# Altium PCB Order2.PcbDoc
Units mm, origin at the board's own origin, x right, y up, seen from the top; angles counter-clockwise.
Board outline 40.89 x 48.64 mm, 2 copper layers (Top Layer, Bottom Layer); 81 components, 0 nets, 359 pads, 52 vias.
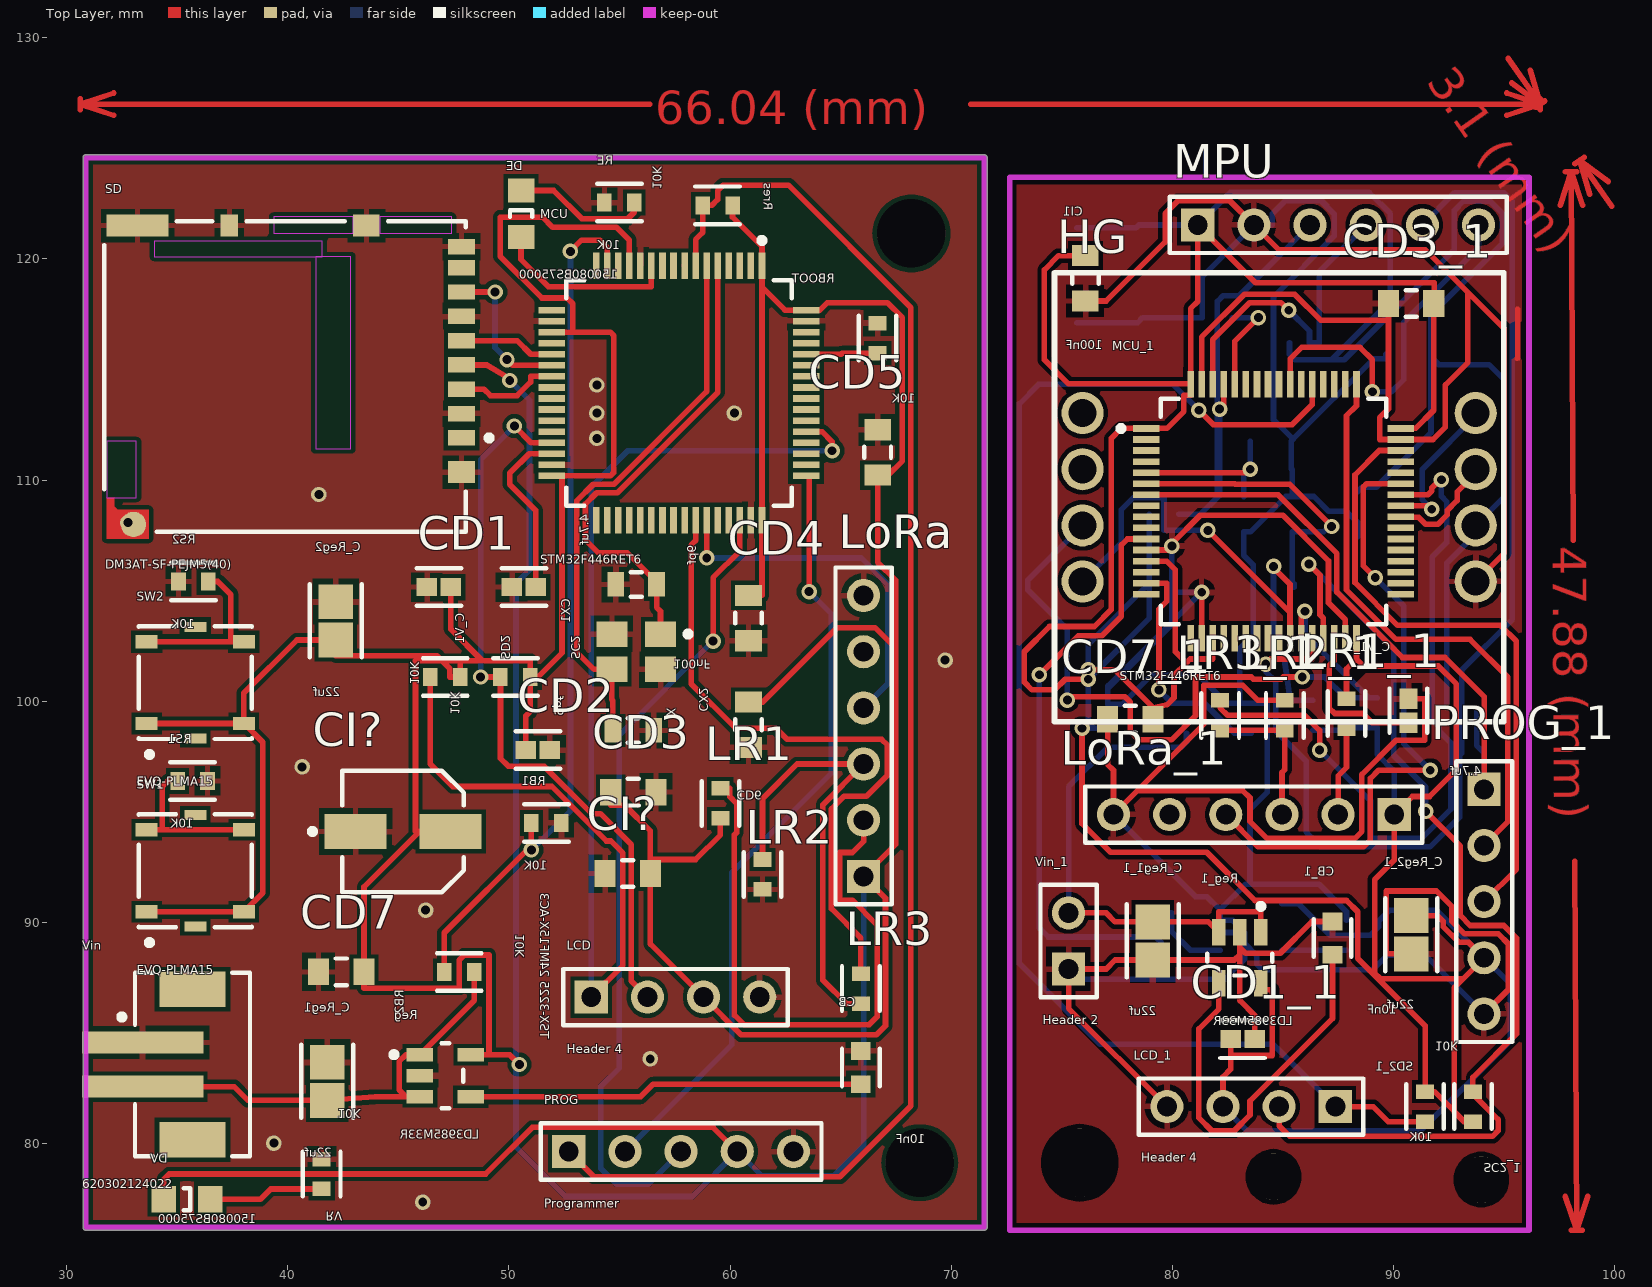
[diagram p0: Top Layer view]
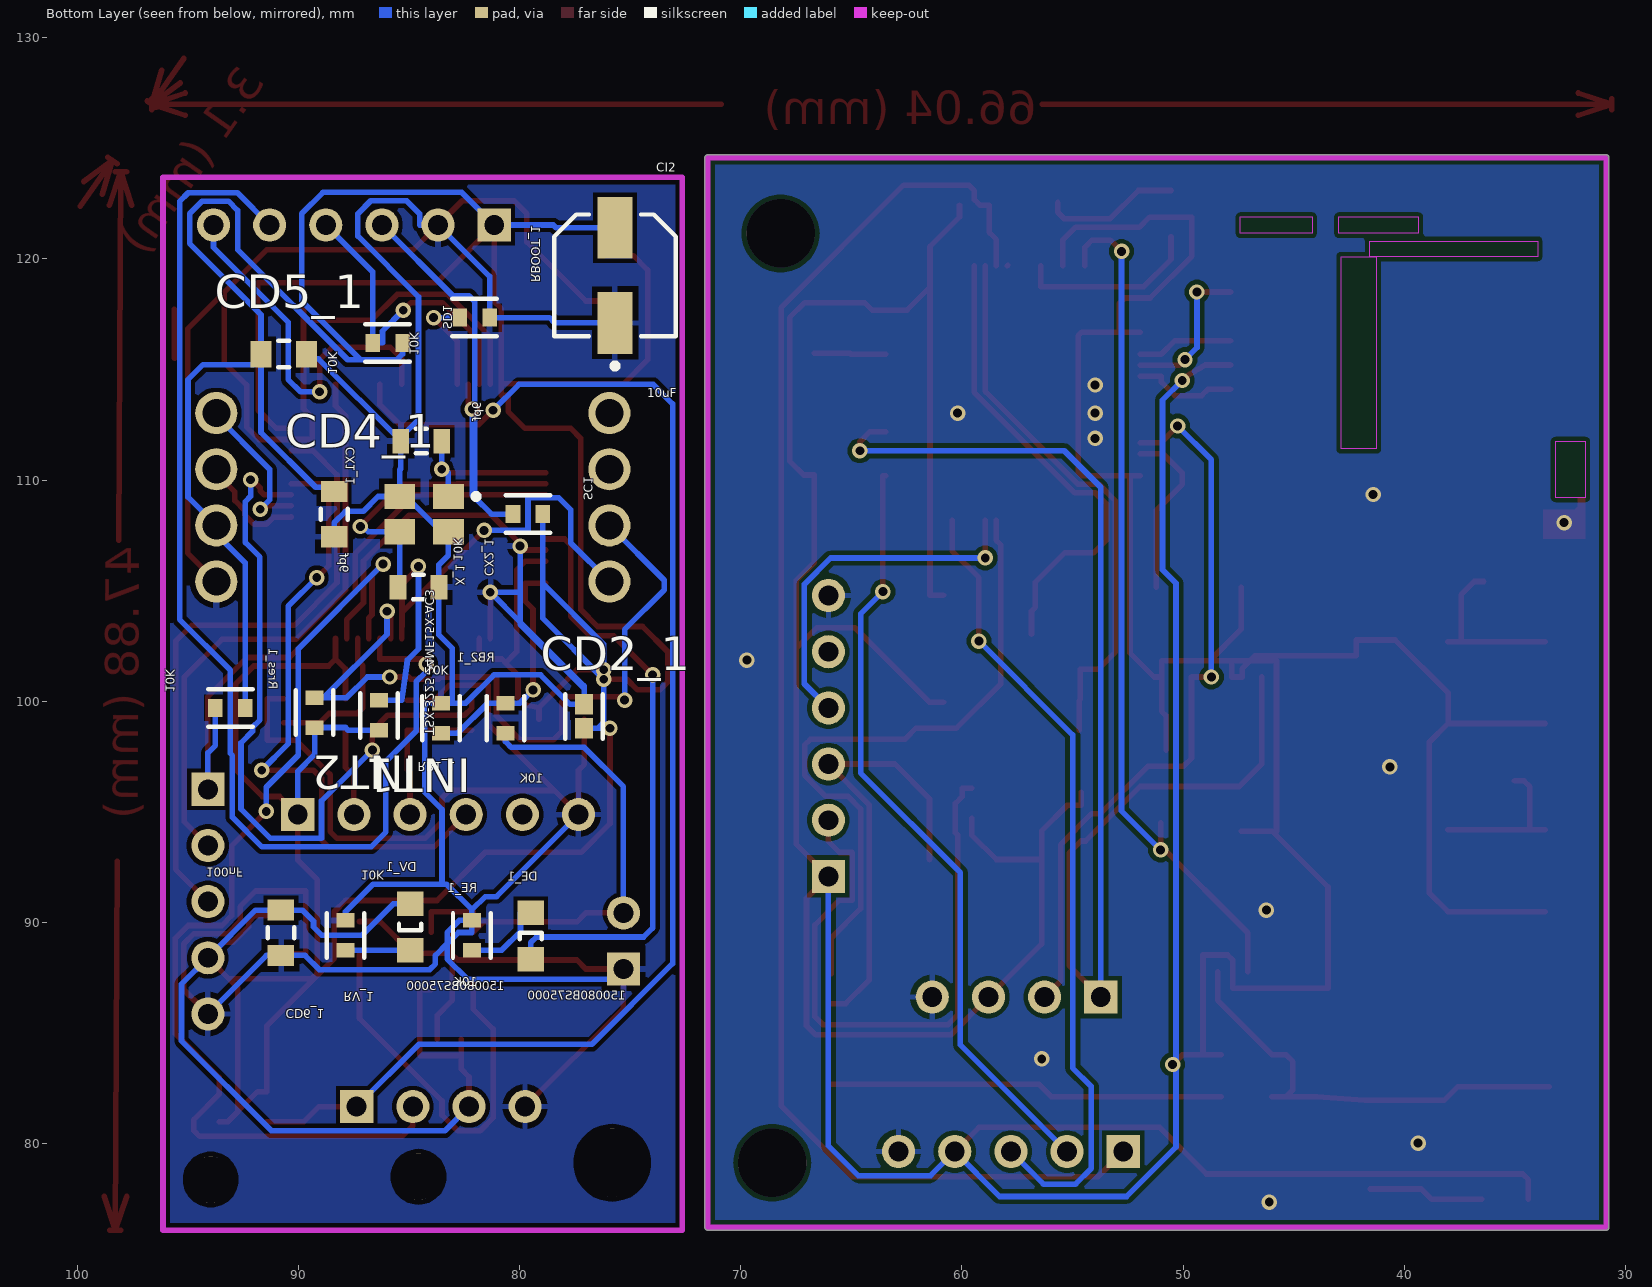
[diagram p1: Bottom Layer view, seen from below]

## Layer stack, top to bottom
Top Solder: solder mask 0.0102, Solder Resist, Dk 3.5
Top Layer: signal copper 0.0356
Dielectric 1: dielectric 0.32, FR-4, Dk 4.8
Bottom Layer: signal copper 0.0356
Bottom Solder: solder mask 0.0102, Solder Resist, Dk 3.5

## Board outline
30.861,76.073 cw(c30.861,76.2) 30.734,76.2 30.734,124.587 cw(c30.861,124.587) 30.861,124.714 71.501,124.714 cw(c71.501,124.587) 71.628,124.587 71.628,76.2 cw(c71.501,76.2) 71.501,76.073

## Design rules (kind name [scope] priority, off if disabled: settings)
Clearance [All] p1: gap=0.254 ignorepadtopadclearanceinfootprint=FALSE except(0: Arc-Hole Track-Hole SMDPad-Hole THPad-Hole Via-Hole Fill-Hole Poly-Hole Region-Hole Text-Hole)
PolygonConnect [All] p1: connectstyle=Relief reliefconductorwidth=0.254 reliefentries=4 polygonreliefangle="90 Angle" airgapwidth=0.254
RoutingVias [All] p1: holewidth=0.711 width=1.27 viastyle="Through Hole" minholewidth=0.711 minwidth=1.27 maxholewidth=0.711 maxwidth=1.27
SolderMaskExpansion [All] p1: expansion=0.102 istentingtop=FALSE
Width [All] p1: maxlimit=0.254 minlimit=0.254 preferedwidth=0.254
30 further rules are at their usual default settings.

## Components (designator, comment, footprint, x,y, rotation, side; value= is the part's Value field where it differs from the comment)
C_Reg1 "22uf" FP-C2012-125-0_2-IPC_A 41.783,82.804 r270 top
C_Reg1_1 "22uf" FP-C2012-125-0_2-IPC_A 79.121,89.154 r90 top (schematic designator C_Reg1)
C_Reg2 "22uf" FP-C2012-125-0_2-IPC_A 42.164,103.632 r270 top
C_Reg2_1 "22uf" FP-C2012-125-0_2-IPC_A 90.805,89.433 r90 top (schematic designator C_Reg2)
C_V1 "4.7uf" FP-C1608-080-0_1-IPC_C 50.673,105.156 r180 top
C_V1_1 "4.7uf" FP-C1608-080-0_1-IPC_C 90.678,99.568 r90 top (schematic designator C_V1)
CB "10nF" FP-CC0603-DA-MFG 65.913,83.427 r90 top value="10 nF"
CB_1 "10nF" FP-CC0603-DA-MFG 87.249,89.281 r90 top value="10 nF" (schematic designator CB)
CD1 "4.7uf" FP-C1608-080-0_1-IPC_C 46.83,105.156 r180 top
CD1_1 "4.7uf" FP-C1608-080-0_1-IPC_C 83.185,84.709 r0 top (schematic designator CD1)
CD2 "4.7uf" FP-C1608-080-0_1-IPC_C 51.308,97.79 r0 top
CD2_1 "4.7uf" FP-C1608-080-0_1-IPC_C 77.089,99.314 r90 bottom (schematic designator CD2)
CD3 "100nF" FP-CGA3E-0_3-0_1-IPC_A 55.626,95.885 r0 top
CD3_1 "100nF" FP-CGA3E-0_3-0_1-IPC_A 90.805,117.983 r180 top (schematic designator CD3)
CD4 "100nF" FP-CGA3E-0_3-0_1-IPC_A 60.833,103.759 r270 top
CD4_1 "100nF" FP-CGA3E-0_3-0_1-IPC_A 88.392,108.458 r270 bottom (schematic designator CD4)
CD5 "100nF" FP-CGA3E-0_3-0_1-IPC_A 66.675,111.252 r90 top
CD5_1 "100nF" FP-CGA3E-0_3-0_1-IPC_A 90.678,115.697 r180 bottom (schematic designator CD5)
CD6 "100nF" FP-CGA3E-0_3-0_1-IPC_A 60.833,98.933 r270 top
CD6_1 "100nF" FP-CGA3E-0_3-0_1-IPC_A 90.805,89.526 r270 bottom (schematic designator CD6)
CD7 "100nF" FP-CGA3E-0_3-0_1-IPC_A 42.418,87.757 r180 top
CD7_1 "100nF" FP-CGA3E-0_3-0_1-IPC_A 78.105,99.187 r180 top (schematic designator CD7)
CI1 "100nF" FP-CGA3E-0_3-0_1-IPC_A 76.073,119.126 r90 top
CI2 "10uF" FP-SC-MFG 75.692,119.262 r90 bottom
CI? "100nF" FP-CGA3E-0_3-0_1-IPC_A 55.372,92.202 r0 top
CI? "10uF" FP-SC-MFG 45.212,94.107 r0 top
CX1 "9pf" FP-CGA3E-0_3-0_1-IPC_B 55.753,105.283 r180 top
CX1_1 "9pf" FP-CGA3E-0_3-0_1-IPC_B 84.455,111.76 r0 bottom (schematic designator CX1)
CX2 "9pf" FP-CGA3E-0_3-0_1-IPC_B 55.626,98.679 r0 top
CX2_1 "9pf" FP-CGA3E-0_3-0_1-IPC_B 84.582,105.156 r180 bottom (schematic designator CX2)
DE "150080BS75000" 0805_A 50.546,122.047 r270 top
DE_1 "150080BS75000" 0805_A 79.502,89.374 r270 bottom (schematic designator DE)
DV "150080BS75000" 0805_A 35.433,77.47 r180 top
DV_1 "150080BS75000" 0805_A 84.963,89.789 r90 bottom (schematic designator DV)
HG "Header 4X2" PCBComponent_1 84.836,109.22 r90 top
INT1 "10K" FP-RC0603-0_55-IPC_C 86.36,99.356 r270 bottom
INT2 "10K" FP-RC0603-0_55-IPC_C 89.281,99.483 r270 bottom
LCD "Header 4" HDR1X4 53.721,86.614 r0 top
LCD_1 "Header 4" HDR1X4 87.376,81.661 r180 top (schematic designator LCD)
LoRa "Header 6" HDR1X6 66.04,92.075 r90 top
LoRa_1 "Header 6" HDR1X6 90.043,94.869 r180 top (schematic designator LoRa)
LR1 "10K" FP-RC0603-0_55-IPC_C 59.563,95.377 r90 top
LR1_1 "10K" FP-RC0603-0_55-IPC_C 87.884,99.441 r270 top (schematic designator LR1)
LR2 "10K" FP-RC0603-0_55-IPC_C 61.468,92.16 r90 top
LR2_1 "10K" FP-RC0603-0_55-IPC_C 85.09,99.356 r270 top (schematic designator LR2)
LR3 "4.7K" FP-RC0603-0_55-IPC_C 65.913,86.995 r270 top
LR3_1 "4.7K" FP-RC0603-0_55-IPC_C 82.169,99.356 r270 top (schematic designator LR3)
MCU "STM32F446RET6" FP-LQFP64-5W-MFG 57.693,113.939 r270 top
MCU_1 "STM32F446RET6" FP-LQFP64-5W-MFG 84.582,108.585 r0 top (schematic designator MCU)
MPU "Header 6" HDR1X6 81.153,121.539 r0 top
PROG "Programmer" HDR1X5 52.705,79.629 r0 top
PROG_1 "Programmer" HDR1X5 94.107,96.012 r270 top (schematic designator PROG)
RB1 "10K" FP-RC0603-0_55-IPC_C 51.689,94.488 r0 top
RB1_1 "10K" FP-RC0603-0_55-IPC_C 83.566,99.229 r90 bottom (schematic designator RB1)
RB2 "10K" FP-RC0603-0_55-IPC_C 47.752,87.757 r180 top
RB2_1 "10K" FP-RC0603-0_55-IPC_C 80.645,99.229 r90 bottom (schematic designator RB2)
RBOOT "10K" FP-RC0603-0_55-IPC_C 66.675,116.417 r90 top
RBOOT_1 "10K" FP-RC0603-0_55-IPC_C 82.042,117.348 r180 bottom (schematic designator RBOOT)
RE "10K" FP-RC0603-0_55-IPC_C 54.991,122.555 r180 top
RE_1 "10K" FP-RC0603-0_55-IPC_C 82.169,89.408 r90 bottom (schematic designator RE)
Reg "LD3985M33R" FP-SOT23-5L-7049676-MFG 47.124,83.058 r0 top
Reg_1 "LD3985M33R" FP-SOT23-5L-7049676-MFG 83.058,88.392 r270 top (schematic designator Reg)
Rres "10K" FP-RC0603-0_55-IPC_C 59.436,122.428 r0 top
Rres_1 "10K" FP-RC0603-0_55-IPC_C 93.091,99.695 r180 bottom (schematic designator Rres)
RS1 "10K" FP-RC0603-0_55-IPC_C 35.687,96.393 r0 top
RS2 "10K" FP-RC0603-0_55-IPC_C 35.729,105.41 r180 top
RV "10K" FP-RC0603-0_55-IPC_C 41.529,78.613 r90 top
RV_1 "10K" FP-RC0603-0_55-IPC_C 87.884,89.408 r90 bottom (schematic designator RV)
SC1 "10K" FP-RC0603-0_55-IPC_C 79.629,108.458 r180 bottom
SC2 "10K" FP-RC0603-0_55-IPC_C 50.292,101.092 r0 top
SC2_1 "10K" FP-RC0603-0_55-IPC_C 93.599,81.661 r270 top (schematic designator SC2)
SD "DM3AT-SF-PEJM5(40)" FP-DM3AT-SF-PEJM5_40-MFG 39.878,114.681 r270 top
SD1 "10K" FP-RC0603-0_55-IPC_C 85.979,116.205 r180 bottom
SD2 "10K" FP-RC0603-0_55-IPC_C 47.117,101.092 r0 top
SD2_1 "10K" FP-RC0603-0_55-IPC_C 91.44,81.661 r90 top (schematic designator SD2)
SW1 "EVQ-PLMA15" FP-EVQ-PLMA15-MFG 35.814,92.329 r90 top
SW2 "EVQ-PLMA15" FP-EVQ-PLMA15-MFG 35.814,100.838 r90 top
Vin "620302124022" 620302124022 35.687,83.566 r90 top
Vin_1 "Header 2" HDR1X2 75.311,87.884 r90 top (schematic designator Vin)
X "TSX-3225 24MF15X-AC3" EPSON-TSX-3225_V 55.753,102.235 r180 top
X_1 "TSX-3225 24MF15X-AC3" EPSON-TSX-3225_V 84.328,108.458 r0 bottom (schematic designator X)

## Footprints (in the part's own frame and the unit in brackets; to place one, negate y for a bottom-side part, rotate by r counter-clockwise, add the part's x,y. Pads: shape width x height; smd on the part's side, far side on the other; paste and mask are expansions set on the pad)
0805_A [mm] "Chip LED, 2-Leads, Body 2.0x1.3mm, IPC Medium Density"
  rect 1.1x1.2 smd: 1(-1.05,0) 2(1.05,0)
  silkscreen extent -0.15,-0.5 0.15,0.5, body extent -1,-0.63 1,0.63, height 0.68
620302124022 [mm] "2.00mm SMT Male Vertical Shrouded Header, 2p"
  rect 1x5.5 smd: 1(1,2.25) 2(-1,2.25)
  rect 1.6x3 smd: MP1(-3.4,0) MP2(3.4,0)
  silkscreen extent -4.15,-2.6 4.15,3.32, body extent -4,-2.5 4,4.51, height 6.77
EPSON-TSX-3225_V [mm] "SMD, 4-Leads, Body 3.2x2.5mm"
  rect 1.4x1.15 smd: 1(-1.1,-0.8) 2(1.1,-0.8) 3(1.1,0.8) 4(-1.1,0.8)
  silkscreen extent -2.48,-0.92 -2.23,-0.68, body extent -1.6,-1.25 1.6,1.25, height 0.6
FP-C1608-080-0_1-IPC_C [mm]
  rect 0.931x0.812 smd paste+0 mask+0: 1(-0.541,0) 2(0.541,0)
  silkscreen extent -1.01,-0.85 1.01,0.85, body extent -0.8,-0.4 0.8,0.4, height 0.9
FP-C2012-125-0_2-IPC_A [mm]
  rect 1.578x1.556 smd paste+0 mask+0: 1(-0.864,0) 2(0.864,0)
  silkscreen extent -1.65,-1.18 1.65,1.18, body extent -1,-0.63 1,0.63, height 1.45
FP-CC0603-DA-MFG [mm]
  rect 0.8x0.9 smd paste+0 mask+0: 1(-0.75,0) 2(0.75,0)
  silkscreen extent -0.85,-0.85 0.85,0.85, body extent -0.8,-0.4 0.8,0.4, height 0.9
FP-CGA3E-0_3-0_1-IPC_A [mm]
  rect 0.956x1.206 smd paste+0 mask+0: 1(-1.025,0) 2(1.025,0)
  silkscreen extent -0.25,-0.6 0.25,0.6, body extent -2,-1.1 2,1.1, height 0.25
FP-CGA3E-0_3-0_1-IPC_B [mm]
  rect 0.756x1.106 smd paste+0 mask+0: 1(-0.925,0) 2(0.925,0)
  silkscreen extent -0.25,-0.55 0.25,0.55, body extent -0.8,-0.4 0.8,0.4, height 1.1
FP-DM3AT-SF-PEJM5_40-MFG [mm]
  rect 0.7x1.2 smd paste+0 mask+0: 1(2.775,7.975) 2(1.675,7.975) 3(0.575,7.975) 4(-0.525,7.975) 5(-1.625,7.975) 6(-2.725,7.975) 7(-3.825,7.975) 8(-4.925,7.975) 9(-5.875,7.975)
  rect 1x0.8 smd paste+0 mask+0: 10(-6.825,-2.525)
  rect 1x1.2 smd paste+0 mask+0: 11(4.325,7.975) 12(-6.825,3.675)
  rect 1x2.8 smd paste+0 mask+0: 13(-6.825,-6.675)
  round 1.145 smd paste+0 mask+0: 14(6.689,-6.861)
  Top Layer region: 6.025,-6.175 7.325,-6.175 7.325,-8.075 5.475,-8.075 5.475,-7.725 5.875,-7.725 6.025,-7.575 6.025,-6.175
  Keep-Out Layer region: 2.925,-8.075 5.475,-8.075 5.475,-6.725 2.925,-6.725
  Keep-Out Layer region: -5.425,1.375 3.275,1.375 3.275,2.975 -5.425,2.975
  Keep-Out Layer region: -6.125,-5.925 -5.425,-5.925 -5.425,1.675 -6.125,1.675
  Keep-Out Layer region: -7.225,-0.525 -6.475,-0.525 -6.475,3.075 -7.225,3.075
  Keep-Out Layer region: -7.225,4.275 -6.475,4.275 -6.475,7.525 -7.225,7.525
  silkscreen extent -7.02,-8.17 7.02,9.35, body extent -6.93,-7.95 6.92,8.2, height 1.68
FP-EVQ-PLMA15-MFG [mm]
  rect 0.45x1 smd paste+0 mask+0: 1(-2.525,0) 2(2.525,0)
  rect 0.6x1 smd paste+0 mask+0: A(-1.85,2.2) A'(-1.85,-2.2) B(1.85,2.2) B'(1.85,-2.2)
  silkscreen extent -3.37,-2.55 2.55,2.55, body extent -2.85,-2.8 2.85,2.8, height 0.25
FP-LQFP64-5W-MFG [mm]
  rect 1.2x0.3 smd paste+0 mask+0: 1(-5.75,3.75) 2(-5.75,3.25) 3(-5.75,2.75) 4(-5.75,2.25) 5(-5.75,1.75) 6(-5.75,1.25) 7(-5.75,0.75) 8(-5.75,0.25) 9(-5.75,-0.25) 10(-5.75,-0.75) 11(-5.75,-1.25) 12(-5.75,-1.75) 13(-5.75,-2.25) 14(-5.75,-2.75) 15(-5.75,-3.25) 16(-5.75,-3.75) 33(5.75,-3.75) 34(5.75,-3.25) 35(5.75,-2.75) 36(5.75,-2.25) 37(5.75,-1.75) 38(5.75,-1.25) 39(5.75,-0.75) 40(5.75,-0.25) 41(5.75,0.25) 42(5.75,0.75) 43(5.75,1.25) 44(5.75,1.75) 45(5.75,2.25) 46(5.75,2.75) 47(5.75,3.25) 48(5.75,3.75)
  rect 0.3x1.2 smd paste+0 mask+0: 17(-3.75,-5.75) 18(-3.25,-5.75) 19(-2.75,-5.75) 20(-2.25,-5.75) 21(-1.75,-5.75) 22(-1.25,-5.75) 23(-0.75,-5.75) 24(-0.25,-5.75) 25(0.25,-5.75) 26(0.75,-5.75) 27(1.25,-5.75) 28(1.75,-5.75) 29(2.25,-5.75) 30(2.75,-5.75) 31(3.25,-5.75) 32(3.75,-5.75) 49(3.75,5.75) 50(3.25,5.75) 51(2.75,5.75) 52(2.25,5.75) 53(1.75,5.75) 54(1.25,5.75) 55(0.75,5.75) 56(0.25,5.75) 57(-0.25,5.75) 58(-0.75,5.75) 59(-1.25,5.75) 60(-1.75,5.75) 61(-2.25,5.75) 62(-2.75,5.75) 63(-3.25,5.75) 64(-3.75,5.75)
  silkscreen extent -7.02,-5.1 5.1,5.1
FP-RC0603-0_55-IPC_C [mm]
  rect 0.659x0.812 smd paste+0 mask+0: 1(-0.677,0) 2(0.677,0)
  silkscreen extent -1.01,-0.85 1.01,0.85, body extent -0.8,-0.4 0.8,0.4, height 0.55
FP-SC-MFG [mm]
  rect 2.8x1.6 smd paste+0 mask+0: 1(-2.15,0) 2(2.15,0)
  silkscreen extent -4.22,-2.75 2.75,2.75, body extent -3,-2.65 3,2.65, height 5.8
FP-SOT23-5L-7049676-MFG [mm]
  rect 1.2x0.6 smd paste+0 mask+0: 1(-1.15,0.95) 2(-1.15,0) 3(-1.15,-0.95) 4(1.15,-0.95) 5(1.15,0.95)
  silkscreen extent -2.45,-1.47 0.8,1.47, body extent -0.87,-1.5 0.88,1.5, height 1.45
HDR1X2 [mm] "Connector; Header; 2 Position"
  rect 1.5x1.5 hole 0.9: 1(0,0)
  round 1.5 hole 0.9: 2(2.54,0)
  silkscreen extent -1.27,-1.27 3.81,1.27
HDR1X4 [mm] "Connector; Header; 4 Position"
  rect 1.5x1.5 hole 0.9: 1(0,0)
  round 1.5 hole 0.9: 2(2.54,0) 3(5.08,0) 4(7.62,0)
  silkscreen extent -1.27,-1.27 8.89,1.27
HDR1X5 [mm] "Connector; Header; 5 Position"
  rect 1.5x1.5 hole 0.9: 1(0,0)
  round 1.5 hole 0.9: 2(2.54,0) 3(5.08,0) 4(7.62,0) 5(10.16,0)
  silkscreen extent -1.27,-1.27 11.43,1.27
HDR1X6 [mm] "Connector; Header; 6 Position"
  rect 1.5x1.5 hole 0.9: 1(0,0)
  round 1.5 hole 0.9: 2(2.54,0) 3(5.08,0) 4(7.62,0) 5(10.16,0) 6(12.7,0)
  silkscreen extent -1.27,-1.27 13.97,1.27
PCBComponent_1 [mil]
  round 75 hole 50: 1(-150,-350) 2(-50,-350) 3(50,-350) 4(150,-350) 5(-150,350) 6(-50,350) 7(50,350) 8(150,350)
  round 74 hole 50: 1(-150,-350) 2(-50,-350) 3(50,-350) 4(150,-350) 5(-150,350) 6(-50,350) 7(50,350) 8(150,350)
  silkscreen extent -400,-400 400,400

## Part data
C_Reg1 C_Reg1_1 C_Reg2 C_Reg2_1: library part CMP-08246-007072-1, "Multilayer Ceramic Capacitors 22μF ±20% 16V X6S SMD 0805", Capacitance=22uF, Case Code (Imperial)=0805, Case Code (Metric)=2012, Dielectric=X6S, Dielectric Material=Ceramic, Max Operating Temperature=105°C, Min Operating Temperature=-55°C, Package Quantity=2000, Tolerance=20%, Voltage Rating=16V, Case/Package=0805, Height=1.25mm, Lead Free="Lead Free", Length=0.079inch, Mount="Surface Mount", Packaging="Tape and Reel", REACH SVHC="No SVHC", RoHS Compliant=Yes, Series=C, Termination=SMD/SMT, Thickness=0.057inch, Voltage Rating (DC)=16V, Weight=0.000194oz, Width=0.049inch
C_V1 C_V1_1 CD1 CD1_1 CD2 CD2_1: library part CMP-2000-04981-2, "Multilayer Ceramic Capacitors 4.7μF ±10% 16V X5R SMD 0603", Capacitance=4.7uF, Case Code (Imperial)=0603, Case Code (Metric)=1608, Dielectric=X5R, Dielectric Material=Ceramic, Max Operating Temperature=85°C, Min Operating Temperature=-55°C, Package Quantity=1, Tolerance=10%, Voltage=16V, Case/Package=0603, Construction=Flat, Depth=0.8mm, Height=0.8mm, Lead Free="Lead Free", Length=1.6mm, Mount="Surface Mount", Packaging="Tape and Reel", REACH SVHC="No SVHC", RoHS Compliant=Yes, Series=C, Termination=SMD/SMT, Thickness=0.035inch, Voltage Rating=16V, Voltage Rating (DC)=16V, Weight=7.1E-05oz, Width=0.031inch
CB CB_1: library part CMP-2100-03600-2, "CAP CER 10000PF 50V X7R 0603", Capacitance="10 nF", Manufacturer=YAGEO, Manufacturer Part Number=CC0603KRX7R9BB103, Package=CC0603-DA, Temperature="-55°C to +125°C", Temperature Characteristic=X7R, Temperature Coefficient=15%, Temperature Range High=+125°C, Temperature Range Low=-55°C, Tolerance=0.1, Voltage="50 V", Automotive=No, Category=Cap, ComponentLink2Description=Datasheet, ComponentLink2URL=http://www.yageo.com/documents/recent/UPY-GPHC_X7R_6.3V-to-50V_18.pdf, Device Class L1="Passive Components", Device Class L2=Capacitors, Device Class L3="Ceramic Capacitors", Digikey Description="CAP CER 10000PF 50V X7R 0603", Footprint Url=http://www.yageo.com/exep/pages/download/literatures/UPY-C_GEN_24.pdf, Height=0.9mm, Lead Free=Yes, Material=Ceramic, Mouser Description="Multilayer Ceramic Capacitor, CC Series, 0.01 - F, - 10%, X7R, 50 V, 0603 [1608 Metric]", Octopart=https://octopart.com/cc0603krx7r9bb103-yageo-192938, RoHS=TRUE, Voltage Rating="50 V"
CD3 CD3_1 CD4 CD4_1 CD5 CD5_1 CD6 CD6_1 CD7 CD7_1 CI1 CI?: library part CMP-2000-07546-2, "Cap Ceramic 100nF 50V X7R 10% Pad SMD 0603 +125°C Automotive T/R", Case Code (Imperial)=0603, Case Code (Metric)=1608, Dielectric=X7R, Max Operating Temperature=125°C, Min Operating Temperature=-55°C, Package Quantity=1, Ratings=AEC-Q200, Tolerance=10%, Voltage=50V, Capacitance=100nF, Case/Package=0603, Composition=Ceramic, Depth=0.8mm, Height=0.8mm, Lead Free="Lead Free", Length=1.6mm, Mount="Surface Mount", Packaging="Tape and Reel", Radiation Hardening=No, REACH SVHC="No SVHC", Termination=SMD/SMT, Thickness=0.035inch, Voltage Rating=50V, Voltage Rating (DC)=50V, Weight=7.1E-05oz, Width=0.8mm
CI2 CI?: library part CMP-05427-000087-1, "CAP ALUM 10UF 20% 35V SMD", Case/Package=Radial, Leakage Current=3uA, Max Operating Temperature=85°C, Min Operating Temperature=-40°C, Package Quantity=1, Ripple Current=30mA, Tolerance=20%, Voltage=35V, Capacitance=10uF, Construction=Cylindrical, Contact Plating=Tin, Diameter=5mm, Height=5.4mm, Height - Seated (Max)=0.213inch, Lead Length=2.2mm, Lead Pitch=1.5mm, Length=5.5mm, Life (Hours)=2000Hour, Mount="Surface Mount", Number of Pins=2, Packaging="Tape and Reel", Radiation Hardening=No, REACH SVHC="No SVHC", Ripple Current (AC)=30mA, RoHS Compliant=Yes, Series=S, Termination=SMD/SMT, Voltage Rating=35V, Voltage Rating (DC)=35V, Width=5.3mm
CX1 CX1_1 CX2 CX2_1: library part CMP-08246-000963-1, "Cap Ceramic 9pF 50V C0G 0.5pF Pad SMD 0603 +125°C Automotive T/R", Capacitance=9pF, Case Code (Imperial)=0603, Case Code (Metric)=1608, Dielectric=C0G, Max Operating Temperature=125°C, Min Operating Temperature=-55°C, Package Quantity=4000, Ratings=AEC-Q200, Voltage Rating=50V, Case/Package=0603, Composition=Ceramic, Depth=0.8mm, Height=0.8mm, Length=1.6mm, Mount="Surface Mount", Packaging="Tape and Reel", REACH SVHC="No SVHC", Termination=SMD/SMT, Thickness=0.035inch, Voltage Rating (DC)=50V, Weight=7.1E-05oz, Width=0.031inch
DE DE_1 DV DV_1: library part CMP-1426-00008-1, "SMD mono-color Chip LED, WL-SMCW, Blue", Color=Blue, Manufacturer="Wuerth Elektronik", ComponentLink1Description="Manufacturer URL", ComponentLink1URL=http://www.we-online.com, ComponentLink2Description=Datasheet, ComponentLink2URL=http://katalog.we-online.com/led/datasheet/150080BS75000.pdf, PackageReference=0805_A, PartNumber=150080BS75000
HG: "Header, 4-Pin, Dual row", LatestRevisionDate=17-Jul-2002, LatestRevisionNote="Re-released for DXP Platform.", Publisher="Altium Limited"
INT1 INT2 LR1 LR1_1 LR2 LR2_1 LR3 LR3_1 RB1 RB1_1 RB2 RB2_1 RBOOT RBOOT_1 RE RE_1 Rres Rres_1 RS1 RS2 RV RV_1 SC1 SC2 SC2_1 SD1 SD2 SD2_1: library part CMP-2100-03664-2, "RES 10K OHM 1% 1/10W 0603", Case Code (Imperial)=0603, Case Code (Metric)=1608, Max Operating Temperature=155°C, Max Power Dissipation=100mW, Min Operating Temperature=-55°C, Resistance=10kR, Resistance Tolerance=1%, Resistor Type="Thick Film", Temperature Coefficient=100ppm/°C, Voltage Rating=75V, Voltage Rating (DC)=50V, Case/Package=0603, Construction=Rectangular, Depth=0.8mm, Features="Moisture Resistant", Height=0.45mm, Lead Free="Lead Free", Lead Pitch=0.3mm, Length=1.6mm, Military Standard=Not, Number of Pins=2, Number of Terminations=2, Packaging="Tape and Reel", Power Rating=100mW, RoHS Compliant=Yes, Series=RC, Size Code=0603, Termination=SMD/SMT, Tolerance=1%, Weight=7.1E-05oz, Width=0.8mm
LCD LCD_1: "Header, 4-Pin", LatestRevisionDate=17-Jul-2002, LatestRevisionNote="Re-released for DXP Platform.", Publisher="Altium Limited"
LoRa LoRa_1 MPU: "Header, 6-Pin", LatestRevisionDate=17-Jul-2002, LatestRevisionNote="Re-released for DXP Platform.", Publisher="Altium Limited"
MCU MCU_1: library part CMP-12105-000007-1, "IC MCU 32BIT 512KB FLASH 64LQFP", Ambient Temperature Range High=+85°C, Ambient Temperature Range Low=-40°C, Frequency=180MHz, Manufacturer=ST, Max Junction Temp=+105°C, Max Supply Voltage=3.6V, Min Supply Voltage=1.7V, Package=LQFP64-5W, Temperature="-40°C to +105°C", Automotive=No, Category=IC, ComponentLink2Description=Datasheet, ComponentLink2URL=https://www.st.com/en/microcontrollers-microprocessors/stm32f446re.html, Core Architecture="ARM Cortex-M4", Data Bus Width=32bits, Device Class L1="Integrated Circuits (ICs)", Device Class L2="Embedded Processors and Controllers", Device Class L3=Microcontrollers, Digikey Description="IC MCU 32BIT 512KB FLASH 64LQFP", Height=1.6mm, Interface=I2C,SPI,UART,USART,CAN,USB,LIN,IrDA,I2S,Other, Ipc Land Pattern Name=QFP50P1200X1200X160-64, Lead Free=Yes, Manufacturer Part Number=STM32F446RET6, Memory Size=512KBytes, Memory Type=FLASH, Mouser Description="ARM Microcontrollers - MCU High-performance and DSP with FP, ARM Cortex-M4 MCU with 512 Kbytes Flash, 180 MHz CPU, Art Accelerator, SDRAM", Number Of A/D Converters=3, Number Of Adc Channels=16, Number Of Cores=1, Number Of I2C Channels=4, Number Of I/Os=50, Number Of Pwm Channels=32, Number Of Spi Channels=4, Number Of Timers/Counters=14, Number Of Uart Channels=6, Number Of Usb Channels=2, Octopart=https://octopart.com/stm32f446ret6-stmicroelectronics-52642920, Ram Size=128KBytes, RoHS=TRUE, Standoff Height=0.05mm, Temperature Range High=+105°C, Temperature Range Low=-40°C
PROG PROG_1: library part "Header 5", "Header, 5-Pin", LatestRevisionDate=17-Jul-2002, LatestRevisionNote="Re-released for DXP Platform.", Publisher="Altium Limited"
Reg Reg_1: library part CMP-0244-00328-2, "IC REG LINEAR 3.3V 150MA SOT23-5", Case/Package=SOT-23, Dropout Voltage=60mV, Input Bias Current=85uA, Max Input Voltage=6V, Max Operating Temperature=125°C, Max Output Current=150mA, Min Current Limit=300mA, Min Input Voltage=2.5V, Min Operating Temperature=-40°C, Min Output Voltage=3.3V, Output Voltage Accuracy=2%, Package Quantity=1, Quiescent Current=150uA, Accuracy=2%, Height=1.3mm, Lead Free="Lead Free", Length=3mm, Mount="Surface Mount", Number Of Outputs=1, Number of Pins=5, Number of Regulators=1, Output Current=150mA, Output Type=Fixed, Output Voltage=3.3V, Packaging="Tape and Reel", Polarity=Positive, Radiation Hardening=No, Width=1.75mm
SD: library part CMP-11597-000006-1, "CONN MICRO SD R/A PUSH-PUSH SMD", Color=Black, Contact Resistance=100mR, Current Rating=500mA, Flammability Rating="UL94 V-0", Insulation Resistance=1GR, Max Operating Temperature=85°C, Max Voltage Rating (AC)=125V, Min Operating Temperature=-25°C, Package Quantity=400, Connector Type=Connector, Contact Material="Copper Alloy", Contact Plating=Gold, Depth=15.95mm, Gender=Receptacle, Housing Material=Polymer, Lead Free="Lead Free", Length=13.85mm, Mating Cycles=10000, Max Current Rating=500mA, Mount="Surface Mount", Number of Contacts=8, Number of Rows=2, Orientation="Right Angle", Packaging="Tape and Reel", Pitch=1.1mm, Radiation Hardening=No, REACH SVHC="No SVHC", Series=DM3, Termination=Solder, Voltage Rating=125V, Voltage Rating (AC)=125V, Width=13.85mm
SW1 SW2: library part CMP-05618-000006-1, "SWITCH TACTILE SPST-NO 0.02A 15V", Contact Current Rating=20mA, Contact Resistance=50mΩ, Manufacturer="Panasonic Electronic Components", Operating Force=2.6N, Package=0, Temperature="-20°C to +70°C", Temperature Range High=+70°C, Temperature Range Low=-20°C, Voltage Rating Dc=15V, Automotive=No, Category=Switch, ComponentLink2Description=Datasheet, ComponentLink2URL=https://datasheet.ciiva.com/8164/atv0000ce2-8164994.pdf, Device Class L1=Electromechanical, Device Class L2=Switches, Device Class L3="Tactile Switches", Digikey Description="SWITCH TACTILE SPST-NO 0.02A 15V", Electromechanical Life=200000Cycles, Height=1.7mm, Lead Free=Yes, Manufacturer Part Number=EVQ-PLMA15, Mount="Surface Mount", Mouser Description="Tactile Switches FLAT ACT 2.6NF 4.6x3.4x1.5mm", Octopart=https://octopart.com/evq-plma15-panasonic-39850235, RoHS=TRUE, Throw Configuration=SPST-NO
Vin: library part CMP-1502-00660-1, "Male Shrouded Header WR-WTB, SMT, Vertical, pitch 2 mm, 1 x 2 position", Contact Resistance=20mOhm, Manufacturer="Wurth Elektronik", Operating Temperature=-25to85degC, Working Voltage=100VAC, Datasheet URL=https://katalog.we-online.de/em/datasheet/6203xx124022.pdf, Gender=Male, Manufacturer URL=http://www.we-online.de, Mounting Technology=SMT, Orientation=Vertical, Package Reference=620302124022, Packaging=TapeandReel, Part Number=620302124022, Pitch=2mm, Position=1x2, Publisher=WurthElektronik
Vin_1: "Header, 2-Pin", LatestRevisionDate=17-Jul-2002, LatestRevisionNote="Re-released for DXP Platform.", Publisher="Altium Limited"
X X_1: library part CMP-2000-07333-1, "MHz Range Crystal, 24 MHz, -40 to 85 degC, 4-Pin SMD, RoHS, Tape and Reel", Frequency=24MHz, Frequency Stability=10PPM, Load Capacitance=9pF, Manufacturer=Epson, Operating Temperature Range=-40Cto+85C, Package / Case=3.2mmx2.5mm, Package Description="4-Pin Surface Mount Device, Body 3.2 x 2.5 mm", Package Reference=TSX-3225, Brand=EpsonTiming, Datasheet URL=https://support.epson.biz/td/api/doc_check.php?dl=brief_FA-238V_en.pdf, Datasheet Version=12/2015, Drive Level=200uW, ESR=40Ohms, Factory Pack Quantity=250, Height=0.6mm, Length=3.2mm, Manufacturer URL=https://www.eea.epson.com/, Mounting Style=SMD/SMT, Mounting Technology=SurfaceMount, Packaging=Reel, Product Category=Crystals, RoHS=True, Series=TSX-3225, Termination Style=SMD/SMT, Tolerance=10PPM, Type=Crystal, Unit Weight=0.000564oz, Width=2.5mm

## Free pads (board coordinates)
  oval 3.1x1.524 hole 3.1: 1(68.199,121.158) 1(68.58,79.121)
  oval 1.524x3.1 hole 3.1: 3(75.819,79.121)
  oval 1.524x2.1 hole 2.1: 4(84.582,78.486) 5(93.98,78.359)

## Via types
v1: diameter 0.7, hole 0.4, Top Layer to Bottom Layer, 52 vias

## Nets (pads, with @x,y where several pads share a name; then routed paths per layer and width w, separated by ;. In a path a pad name is that pad's centre, name@x,y a point inside that pad or via, vN(x,y) a via of type N, cw(c..) or ccw(c..) an arc to the next point about the centre after c; other vN are vias at no path point)
pads on no net: C_Reg1.1 C_Reg1.2 C_Reg1_1.1 C_Reg1_1.2 C_Reg2.1 C_Reg2.2 C_Reg2_1.1 C_Reg2_1.2 C_V1.1 C_V1.2 C_V1_1.1 C_V1_1.2 CB.1 CB.2 CB_1.1 CB_1.2 CD1.1 CD1.2 CD1_1.1 CD1_1.2 CD2.1 CD2.2 CD2_1.1 CD2_1.2 CD3.1 CD3.2 CD3_1.1 CD3_1.2 CD4.1 CD4.2 CD4_1.1 CD4_1.2 CD5.1 CD5.2 CD5_1.1 CD5_1.2 CD6.1 CD6.2 CD6_1.1 CD6_1.2 CD7.1 CD7.2 CD7_1.1 CD7_1.2 CI1.1 CI1.2 CI2.1 CI2.2 CI?.1 CI?.2 CX1.1 CX1.2 CX1_1.1 CX1_1.2 CX2.1 CX2.2 CX2_1.1 CX2_1.2 DE.1 DE.2 DE_1.1 DE_1.2 DV.1 DV.2 DV_1.1 DV_1.2 HG.1 HG.2 HG.3 HG.4 HG.5 HG.6 HG.7 HG.8 INT1.1 INT1.2 INT2.1 INT2.2 LCD.1 LCD.2 LCD.3 LCD.4 LCD_1.1 LCD_1.2 LCD_1.3 LCD_1.4 LoRa.1 LoRa.2 LoRa.3 LoRa.4 LoRa.5 LoRa.6 LoRa_1.1 LoRa_1.2 LoRa_1.3 LoRa_1.4 LoRa_1.5 LoRa_1.6 LR1.1 LR1.2 LR1_1.1 LR1_1.2 LR2.1 LR2.2 LR2_1.1 LR2_1.2 LR3.1 LR3.2 LR3_1.1 LR3_1.2 MCU.1 MCU.2 MCU.3 MCU.4 MCU.5 MCU.6 MCU.7 MCU.8 MCU.9 MCU.10 MCU.11 MCU.12 MCU.13 MCU.14 MCU.15 MCU.16 MCU.17 MCU.18 MCU.19 MCU.20 MCU.21 MCU.22 MCU.23 MCU.24 MCU.25 MCU.26 MCU.27 MCU.28 MCU.29 MCU.30 MCU.31 MCU.32 MCU.33 MCU.34 MCU.35 MCU.36 MCU.37 MCU.38 MCU.39 MCU.40 MCU.41 MCU.42 MCU.43 MCU.44 MCU.45 MCU.46 MCU.47 MCU.48 MCU.49 MCU.50 MCU.51 MCU.52 MCU.53 MCU.54 MCU.55 MCU.56 MCU.57 MCU.58 MCU.59 MCU.60 MCU.61 MCU.62 MCU.63 MCU.64 MCU_1.1 MCU_1.2 MCU_1.3 MCU_1.4 MCU_1.5 MCU_1.6 MCU_1.7 MCU_1.8 MCU_1.9 MCU_1.10 MCU_1.11 MCU_1.12 MCU_1.13 MCU_1.14 MCU_1.15 MCU_1.16 MCU_1.17 MCU_1.18 MCU_1.19 MCU_1.20 MCU_1.21 MCU_1.22 MCU_1.23 MCU_1.24 MCU_1.25 MCU_1.26 MCU_1.27 MCU_1.28 MCU_1.29 MCU_1.30 MCU_1.31 MCU_1.32 MCU_1.33 MCU_1.34 MCU_1.35 MCU_1.36 MCU_1.37 MCU_1.38 MCU_1.39 MCU_1.40 MCU_1.41 MCU_1.42 MCU_1.43 MCU_1.44 MCU_1.45 MCU_1.46 MCU_1.47 MCU_1.48 MCU_1.49 MCU_1.50 MCU_1.51 MCU_1.52 MCU_1.53 MCU_1.54 MCU_1.55 MCU_1.56 MCU_1.57 MCU_1.58 MCU_1.59 MCU_1.60 MCU_1.61 MCU_1.62 MCU_1.63 MCU_1.64 MPU.1 MPU.2 MPU.3 MPU.4 MPU.5 MPU.6 PROG.1 PROG.2 PROG.3 PROG.4 PROG.5 PROG_1.1 PROG_1.2 PROG_1.3 PROG_1.4 PROG_1.5 RB1.1 RB1.2 RB1_1.1 RB1_1.2 RB2.1 RB2.2 RB2_1.1 RB2_1.2 RBOOT.1 RBOOT.2 RBOOT_1.1 RBOOT_1.2 RE.1 RE.2 RE_1.1 RE_1.2 Reg.1 Reg.2 Reg.3 Reg.4 Reg.5 Reg_1.1 Reg_1.2 Reg_1.3 Reg_1.4 Reg_1.5 Rres.1 Rres.2 Rres_1.1 Rres_1.2 RS1.1 RS1.2 RS2.1 RS2.2 RV.1 RV.2 RV_1.1 RV_1.2 SC1.1 SC1.2 SC2.1 SC2.2 SC2_1.1 SC2_1.2 SD1.1 SD1.2 SD2.1 SD2.2 SD2_1.1 SD2_1.2 SD.1 SD.2 SD.3 SD.4 SD.5 SD.6 SD.7 SD.8 SD.9 SD.10 SD.11 SD.12 SD.13 SD.14 SW1.1 SW1.2 SW1.A SW1.A' SW1.B SW1.B' SW2.1 SW2.2 SW2.A SW2.A' SW2.B SW2.B' Vin.1 Vin.2 Vin.MP1 Vin.MP2 Vin_1.1 Vin_1.2 X.1 X.2 X.3 X.4 X_1.1 X_1.2 X_1.3 X_1.4
copper on no net: | length 2058.1
  Top Layer w0.254: 30.607,126.746 30.607,127.254 ; 32.131,126.492 30.607,127 ; 32.131,127.508 30.607,127 ; 33.437,82.566 37.567,82.566 38.193,81.94 41.783,81.94 43.958,82.108 45.349,82.108 ; 33.614,90.479 38.014,90.479 38.862,91.327 38.862,98.14 38.014,98.988 37.998,98.988 ; 33.614,94.179 34.315,94.179 ; 33.614,98.988 37.998,98.988 ; 33.614,102.688 37.418,102.688 ; 34.383,77.47 34.383,78.359 34.637,78.613 48.946,78.613 51.054,80.721 59.233,80.721 60.325,79.629 ; 35.01,96.393 34.569,96.393 34.315,96.139 34.315,94.179 ; 36.405,105.41 36.83,105.41 37.418,104.822 37.418,102.688 ; 36.483,77.47 38.76,77.47 39.227,77.936 41.529,77.936 ; 38.014,94.179 34.315,94.179 ; 38.014,102.688 37.418,102.688 ; 45.974,82.108 45.349,82.108 ; 46.44,101.092 46.44,97.155 47.456,96.139 51.94,96.139 54.404,93.675 54.609,93.675 55.152,93.132 55.152,88.045 53.721,86.614 ; 47.075,87.757 47.075,89.526 v1@51.012,93.463 ; 47.362,94.107 45.949,94.107 ; 47.371,105.156 47.371,103.251 48.793,101.829 ; 47.853,114.106 48.87,114.106 49.158,113.817 50.368,113.817 50.978,114.427 50.978,114.689 51.943,114.689 ; 47.853,115.206 48.997,115.206 49.86,114.681 v1(50.038,114.503) ; 47.853,116.306 50.368,116.306 50.985,115.689 51.943,115.689 ; 47.853,118.506 v1(49.369,118.506) ; 48.274,82.108 55.956,82.108 56.525,82.677 65.913,82.677 ; 48.274,84.008 49.098,84.008 ; 48.429,87.757 48.429,86.463 45.974,84.008 45.349,84.008 45.034,83.693 45.034,82.423 45.349,82.108 ; v1(48.717,101.092) 49.615,101.092 49.615,97.409 49.971,97.053 51.587,97.053 53.731,94.91 54.136,94.91 55.533,93.513 55.533,87.342 56.261,86.614 ; v1(49.911,115.45) 50.172,115.189 51.943,115.189 ; v1(50.246,112.446) 51.003,111.689 51.943,111.689 ; v1(50.47,83.566) 50.028,84.008 49.098,84.008 ; 50.546,120.997 50.546,119.979 51.78,118.745 56.443,118.745 56.443,119.689 ; 50.546,123.097 52.019,123.097 53.298,121.818 55.372,121.818 55.668,122.114 55.668,122.555 ; 50.767,97.79 50.767,99.339 50.969,99.541 50.969,101.092 ; v1(51.012,93.269) v1@51.012,93.463 ; 51.012,94.488 v1@51.012,93.463 ; 51.214,105.156 51.214,108.627 50.038,109.803 50.038,110.311 50.916,111.189 51.943,111.189 ; 51.943,110.189 52.4,110.189 ; 51.943,116.689 52.883,116.689 ; 52.705,79.629 53.848,78.486 64.973,78.486 68.174,81.686 68.174,117.805 62.636,123.342 59.69,123.342 59.436,123.088 59.436,122.682 59.182,122.428 58.759,122.428 58.759,121.195 58.443,120.879 58.443,119.689 ; v1(52.781,120.345) 53.289,120.853 54.113,120.853 54.443,120.523 54.443,119.689 ; 54.601,95.885 54.601,95.291 55.239,95.291 56.397,94.133 56.397,92.837 ; 54.701,98.679 54.701,100.025 54.653,100.073 54.653,101.435 53.848,101.435 53.061,102.222 53.061,109.058 53.811,109.808 54.746,109.808 58.943,114.005 58.943,119.689 ; 55.443,119.689 55.443,120.858 54.864,121.437 51.968,121.437 51.511,121.895 49.606,121.895 49.606,120.117 51.486,118.237 52.629,118.237 52.883,117.983 52.883,116.689 ; 56.365,127 30.607,127 ; 56.853,103.035 56.853,104.064 56.678,104.239 56.678,105.283 56.678,105.385 55.357,106.705 54.051,106.705 53.464,107.293 53.464,108.922 53.969,109.427 54.904,109.427 59.443,113.966 59.443,119.689 ; 57.92,119.712 57.943,119.689 ; 58.443,108.189 58.443,107.264 58.242,107.063 58.242,100.787 60.249,98.781 62.078,98.781 62.586,98.273 66.853,98.273 67.117,98.008 67.117,96.647 66.167,95.697 65.156,95.697 64.582,95.123 64.582,90.617 65.913,89.286 65.913,87.672 ; v1(58.943,106.477) 58.943,108.189 ; v1(59.233,102.718) 59.233,105.587 60.443,106.798 60.443,108.189 ; 59.563,94.7 59.563,93.955 58.445,92.837 56.397,92.837 ; 59.563,96.054 59.995,96.054 59.995,95.678 60.296,95.377 60.296,94.056 60.198,93.958 60.198,85.801 60.63,85.369 66.294,85.369 66.65,85.725 66.65,89.88 65.532,90.998 64.963,90.998 64.963,93.152 65.532,93.152 66.04,93.66 66.04,94.615 ; 60.113,122.428 60.113,121.895 61.443,120.565 61.443,119.689 61.443,118.73 ; 60.833,99.958 61.477,99.958 64.846,103.327 66.548,103.327 67.498,102.377 ; 60.833,104.784 61.443,104.784 61.443,108.189 61.443,118.73 ; 61.468,92.837 61.468,95.588 63.035,97.155 66.04,97.155 64.201,95.316 64.201,87.376 65.259,86.318 65.913,86.318 ; 63.443,110.189 63.576,110.189 v1(63.576,104.953) ; 63.443,112.189 64.163,112.189 64.618,111.735 v1(64.618,111.328) ; 63.443,115.689 65.024,115.689 65.076,115.741 66.675,115.741 ; 70.889,127 96.647,127 ; v1(73.99,101.194) 75.755,102.959 76.816,102.959 77.699,103.842 77.699,107.061 77.973,107.335 78.832,107.335 ; v1(75.26,100.045) 75.418,100.203 77.851,100.203 78.105,99.949 78.105,98.628 78.486,98.247 79.959,98.247 81.051,99.339 81.051,101.092 83.574,101.092 83.667,100.999 84.928,100.999 85.021,101.092 v1(85.877,101.092) ; 75.311,90.424 77.013,90.424 77.419,90.018 79.121,90.018 81.632,90.018 82.108,89.542 82.108,90.475 84.008,90.475 84.008,89.542 ; v1(75.921,98.773) 75.921,94.463 77.216,93.167 81.559,93.167 83.744,90.983 87.884,90.983 88.392,90.475 88.392,88.367 91.44,85.319 91.44,82.338 91.865,82.338 92.761,81.441 ; 76.073,118.101 77.013,118.101 79.68,120.768 79.68,122.047 80.264,122.631 82.601,122.631 83.693,121.539 84.811,120.421 91.44,120.421 93.37,118.491 ; 76.073,120.151 74.863,120.151 74.219,119.507 74.219,115.443 75.311,114.351 80.832,114.351 ; v1(76.2,100.99) 75.159,100.99 74.676,100.508 73.66,100.508 73.304,100.863 73.304,102.235 74.447,103.378 76.479,103.378 77.241,104.14 77.241,111.887 77.689,112.335 78.832,112.335 79.756,112.335 80.527,113.106 80.527,113.834 80.832,113.834 80.832,114.335 80.832,114.351 ; v1(76.2,101.422) 77.419,101.422 79.13,99.711 ; 77.08,99.187 77.08,97.139 77.343,96.876 77.343,94.869 78.435,95.961 ; 78.832,105.335 79.759,105.335 79.759,104.524 79.4,104.165 v1(79.4,100.508) ; 78.832,106.335 79.745,106.335 80.14,105.94 80.14,102.235 80.641,101.734 ; 78.832,106.835 79.809,106.835 v1(79.985,107.01) 79.985,107.124 81.268,108.407 85.005,108.407 87.067,106.345 87.067,104.449 87.832,103.684 87.832,102.835 ; 78.832,109.335 84.788,109.335 87.448,106.675 87.448,104.932 90.407,101.972 92.338,101.972 94.107,100.203 94.107,96.012 ; 78.832,109.835 82.824,109.835 82.855,109.804 85.319,109.804 87.207,107.916 v1(87.207,107.899) ; 78.832,110.335 83.375,110.335 v1(83.53,110.49) ; 79.13,99.187 79.13,99.711 ; 79.756,81.661 75.311,86.106 75.311,87.884 77.013,87.884 77.419,88.29 79.121,88.29 82.804,88.29 83.058,88.544 ; v1(81.204,113.157) 81.853,112.508 85.429,112.508 86.332,113.411 86.332,114.335 ; 81.332,102.835 v1(81.332,104.927) ; 81.332,114.335 81.332,116.468 83.27,118.406 85.538,118.406 86.723,117.221 89.78,117.221 ; v1(81.61,107.721) 85.327,104.004 ; 81.832,102.835 81.832,101.905 80.812,101.905 80.641,101.734 ; 81.832,114.335 81.832,116.351 83.506,118.025 84.921,118.025 v1(85.268,117.678) ; 82.108,87.242 82.108,86.081 81.204,85.176 81.204,81.153 81.788,80.569 82.804,80.569 83.515,81.28 83.515,81.915 87.249,85.649 87.249,88.531 ; v1(82.144,113.208) 82.332,113.396 82.332,114.335 ; 82.169,98.679 85.09,98.679 85.09,96.901 84.963,96.774 84.963,94.869 ; 82.169,100.032 82.169,99.695 82.499,99.365 85.979,99.365 86.665,98.679 v1(86.665,97.79) ; 82.296,81.661 82.296,83.007 82.644,83.356 82.644,83.972 ; 82.423,94.869 83.881,93.411 88.646,93.411 88.961,93.726 88.961,96.505 89.332,96.876 v1(91.669,96.876) ; 82.644,84.709 82.644,83.972 ; 82.832,114.335 82.832,116.284 v1(83.896,117.348) ; 83.058,89.542 83.058,88.849 ; 83.726,84.709 83.726,85.794 83.058,86.462 83.058,88.544 ; 84.008,87.242 84.008,86.944 84.531,86.944 84.531,83.972 82.644,83.972 ; v1(84.226,101.676) 84.455,101.905 86.332,101.905 86.332,102.835 ; v1(84.582,106.096) 84.582,106.033 85.327,105.288 85.327,104.004 ; 84.836,81.661 84.836,80.797 85.319,80.315 94.488,80.315 94.742,80.569 94.742,81.077 93.599,82.22 93.599,82.338 93.599,82.982 95.58,84.963 95.58,89.271 94.996,89.855 93.472,89.855 93.03,90.297 93.03,93.447 v1(91.465,95.011) ; 85.09,100.032 83.872,100.032 83.193,100.711 81.432,100.711 81.432,98.958 78.435,95.961 ; 85.332,102.835 85.332,103.387 85.327,103.387 85.327,104.004 ; 85.332,114.335 85.332,115.482 85.852,116.002 88.494,116.002 89.052,115.443 v1(89.052,113.995) ; 85.832,102.835 85.832,103.891 v1(86.004,104.064) ; v1(86.182,106.197) 86.686,105.694 86.686,103.909 86.832,103.763 86.832,102.835 ; 87.249,90.031 86.323,90.031 84.887,88.595 83.312,88.595 83.058,88.849 ; 87.332,102.835 87.332,101.835 87.097,101.6 87.097,99.695 87.351,99.441 88.621,99.441 89.034,99.027 90.678,99.027 ; 87.376,81.661 89.087,81.661 89.764,80.984 91.44,80.984 ; 87.503,94.869 87.503,96.622 87.884,97.003 87.884,98.764 ; 87.884,100.118 87.884,101.457 88.332,101.905 ; 88.332,102.835 88.332,101.905 ; 88.332,114.335 88.332,113.36 87.884,112.912 87.884,105.034 90.125,102.794 93.472,102.794 95.184,101.082 95.184,94.549 94.107,93.472 ; v1(89.179,105.588) 88.646,106.121 88.646,109.686 88.795,109.835 90.332,109.835 ; 89.78,117.983 89.78,117.221 ; 90.332,108.335 90.355,108.312 91.148,108.312 91.456,108.004 92.017,108.004 92.447,108.434 92.447,108.634 92.885,109.073 92.885,109.463 93.726,110.304 93.726,110.49 ; 90.332,108.835 91.462,108.835 91.616,108.681 v1(91.736,108.681) ; 90.332,109.335 91.561,109.335 91.741,109.515 91.741,109.654 92.098,110.011 v1(92.173,110.011) ; 90.332,111.335 89.364,111.335 88.265,110.236 88.265,105.359 90.195,103.429 94.844,103.429 95.565,102.707 95.565,92.39 94.107,90.932 ; 90.332,112.335 91.008,112.335 91.83,113.157 91.83,117.983 91.846,117.983 91.846,118.923 83.769,118.923 81.153,121.539 81.153,118.075 80.832,117.754 80.832,114.351 ; 90.678,100.109 91.415,100.109 91.415,98.235 90.132,98.235 88.58,96.683 88.58,94.107 88.265,93.792 84.287,93.792 83.515,94.564 83.515,95.631 83.185,95.961 78.435,95.961 ; 90.805,88.569 89.687,88.569 89.687,91.415 91.948,91.415 92.649,90.714 92.649,90.043 93.218,89.474 94.752,89.474 95.199,89.027 95.199,86.944 94.107,85.852 ; 90.805,90.297 91.999,90.297 92.253,90.043 92.253,89.804 92.964,89.093 93.406,89.093 94.107,88.392 93.167,87.452 ; 93.599,80.984 93.218,80.984 ; 93.726,105.41 95.021,106.705 95.021,116.84 93.37,118.491 ; 95.123,126.492 96.647,127 ; 95.123,127.508 96.647,127 ; 95.19,129.081 96.647,127 ; 95.357,127.957 96.647,127 ; 95.613,115.509 95.631,115.527 95.631,117.729 ; 96.189,128.54 96.647,127 ; 96.439,126.854 96.855,127.146 ; 96.647,126.746 96.647,127.254 ; 97.544,122.425 98.044,123.952 ; 97.782,77.594 98.298,76.073 ; 97.79,123.951 98.298,123.953 ; 98.044,76.072 98.552,76.074 ; 98.132,107.275 98.044,123.952 ; 98.21,92.75 98.298,76.073 ; 98.217,124.314 98.633,124.606 ; 98.56,122.431 98.044,123.952 ; 98.798,77.6 98.298,76.073 ; 98.883,122.92 98.425,124.46 ; 99.715,123.503 98.425,124.46 ; 99.882,122.379 98.425,124.46 ; 37.998,98.988 37.998,100.355 40.411,102.768 42.164,102.768 42.164,102.057 46.736,102.057 46.965,101.829 ; 45.949,94.107 43.443,91.601 43.443,87.757 43.443,87.02 47.752,87.02 47.752,88.29 47.981,88.519 49.098,88.519 49.098,84.008 ; 45.949,94.107 45.771,94.107 45.771,101.829 46.965,101.829 ; 46.965,101.829 47.32,101.473 47.32,101.092 47.794,101.092 47.794,101.829 ; 46.965,101.829 47.794,101.829 ; 47.794,101.829 48.793,101.829 ; 48.793,101.829 50.969,101.829 50.969,101.092 ; 50.969,101.092 51.308,101.092 52.4,102.184 52.4,110.189 ; 52.4,110.189 54.588,110.189 54.737,110.338 54.737,116.54 54.588,116.689 52.883,116.689 ; 56.397,92.837 56.397,92.202 56.397,89.018 58.801,86.614 60.503,84.912 66.624,84.912 67.031,85.319 67.031,91.084 66.04,92.075 67.498,93.533 67.498,102.377 ; 61.443,118.73 62.484,117.689 63.443,117.689 64.064,117.689 64.404,118.028 67.112,118.028 67.793,117.348 67.793,110.862 67.158,110.227 66.675,110.227 66.675,106.284 67.498,105.461 67.498,102.377 ; 79.13,99.711 79.756,99.831 80.081,100.156 80.081,101.174 80.641,101.734 ; 83.058,88.544 83.058,88.849 ; 88.332,101.905 88.646,101.591 92.033,101.591 92.854,100.771 92.854,96.901 91.641,95.688 90.862,95.688 90.043,94.869 90.043,92.812 89.154,91.923 89.154,87.706 89.408,87.452 93.167,87.452 ; 89.78,117.221 89.78,113.224 89.383,112.827 89.383,111.835 90.332,111.835 91.796,111.835 92.354,112.394 92.354,114.3 93.37,115.316 93.37,118.491 ; 92.761,81.441 92.761,81.407 93.184,80.984 93.218,80.984 ; 92.761,81.441 92.761,87.046 93.167,87.452 ; 92.761,81.441 93.218,80.984
  Bottom Layer w0.254: v1(48.717,101.092) 48.717,110.917 v1(50.246,112.446) ; v1(49.369,118.506) 49.369,115.992 v1(49.911,115.45) ; v1(50.038,114.503) 50.927,113.614 50.927,105.943 50.317,105.334 v1@50.317,83.566 ; v1(50.47,83.566) v1@50.317,83.566 ; v1(51.012,93.269) 52.781,95.038 v1(52.781,120.345) ; 53.721,86.614 53.721,109.677 55.372,111.328 v1(64.618,111.328) ; 55.245,79.629 60.071,84.455 60.071,92.24 64.582,96.751 64.582,103.947 v1(63.576,104.953) ; 57.785,79.629 56.312,78.156 54.864,78.156 54.153,78.867 54.153,82.575 54.991,83.414 54.991,98.476 v1(59.233,102.718) ; v1(58.943,106.477) 65.938,106.477 67.132,105.283 67.132,100.787 66.04,99.695 ; 66.04,92.075 66.04,79.883 64.694,78.537 61.417,78.537 60.325,79.629 58.293,77.597 52.553,77.597 50.317,79.832 v1@50.317,83.566 ; v1(73.99,101.194) 73.99,89.738 74.397,89.332 79.248,89.332 79.502,89.078 79.502,88.324 ; v1(75.26,100.045) 75.26,103.234 73.466,105.029 73.466,105.47 75.946,107.95 ; 75.311,87.884 75.768,87.427 82.372,87.427 83.287,88.341 83.287,89.027 ; 75.311,90.424 75.311,96.139 77.089,97.917 80.391,97.917 80.645,98.171 80.645,98.552 ; 75.692,117.112 78.428,117.112 78.664,117.348 81.365,117.348 81.365,119.211 83.693,121.539 84.531,121.539 84.531,122.047 85.115,122.631 86.741,122.631 87.325,122.047 87.325,121.031 84.582,118.288 84.582,112.736 85.469,111.849 ; 75.692,121.412 78.359,121.412 78.486,121.539 81.153,121.539 82.626,123.012 88.9,123.012 89.865,122.047 89.865,118.11 87.198,115.443 ; v1(75.921,98.773) 76.454,98.773 ; 75.946,105.41 77.699,107.163 77.699,108.661 78.232,109.195 79.629,109.195 79.629,107.721 v1(81.61,107.721) ; 77.089,98.773 76.454,98.773 ; 77.343,94.869 81.051,91.161 81.559,91.161 82.169,90.576 ; 78.952,108.458 78.952,105.317 ; v1(79.4,100.508) 80.003,99.905 80.645,99.905 81.451,99.905 82.804,98.552 83.566,98.552 ; 79.502,90.424 79.968,90.424 79.968,89.586 80.823,88.731 82.169,88.731 ; v1(79.985,107.01) 79.985,104.927 ; 80.306,108.458 81.28,108.458 82.042,109.22 ; v1(81.204,113.157) 80.035,114.325 73.965,114.325 73.085,113.445 73.085,88.129 76.733,84.48 84.557,84.48 87.376,81.661 ; v1(82.144,113.208) 82.144,109.322 82.042,109.22 ; 82.296,81.661 83.388,80.569 91.237,80.569 95.301,84.633 95.301,87.198 94.107,88.392 91.948,90.551 90.805,90.551 89.84,90.551 89.332,90.043 89.332,89.789 88.951,89.408 87.147,89.408 85.716,90.839 84.963,90.839 ; 82.719,117.348 v1(83.896,117.348) ; 83.228,109.258 83.228,110.338 v1@83.53,110.64 ; v1(83.53,110.49) v1@83.53,110.64 ; 83.53,111.76 v1@83.53,110.64 ; v1(84.226,101.676) 84.226,101.346 84.684,100.889 84.684,98.654 86.055,97.282 86.055,94.082 86.726,93.411 91.658,93.411 92.997,94.75 92.997,97.544 93.091,97.638 93.091,101.397 95.386,103.692 95.386,122.607 94.996,122.997 92.771,122.997 91.313,121.539 ; v1(84.582,106.096) 84.582,102.362 85.077,101.867 85.335,100.032 86.36,100.032 ; 84.963,88.739 86.428,88.739 86.436,88.731 87.884,88.731 ; v1(85.268,117.678) 86.208,116.738 86.208,116.205 86.656,116.205 86.656,119.422 88.773,121.539 ; 85.302,116.205 85.302,115.697 85.556,115.443 87.198,115.443 ; 85.507,105.156 85.507,105.307 85.428,105.386 85.428,107.658 86.845,107.658 87.086,107.899 v1(87.207,107.899) ; v1(85.877,101.092) 86.893,101.092 87.826,100.159 88.867,100.159 ; v1(86.004,104.064) 86.004,103.022 88.867,100.159 ; v1(86.182,106.197) 90.018,102.362 90.018,97.553 91.465,96.105 v1(91.465,95.011) ; 86.233,121.539 83.033,118.339 82.296,118.339 82.042,118.085 82.042,109.22 ; 86.36,98.679 87.757,98.679 87.884,98.806 89.281,98.806 89.281,97.587 90.043,96.825 90.043,94.869 ; v1(86.665,97.79) 88.966,95.489 88.966,93.792 91.277,93.792 92.608,95.123 92.608,98.111 92.075,98.645 92.075,98.836 91.758,99.153 91.758,106.521 92.413,107.176 92.413,109.025 92.173,109.266 v1(92.173,110.011) ; 87.884,90.085 87.884,90.475 86.639,91.719 83.515,91.719 ; 88.392,107.433 88.392,108.077 87.884,108.585 87.081,108.585 86.408,109.258 85.428,109.258 ; 88.392,109.483 88.583,109.674 89.227,109.674 91.703,112.15 91.703,115.572 ; v1(89.052,113.995) 89.916,113.995 90.475,114.554 90.475,117.145 93.853,120.523 93.853,121.539 ; v1(89.179,105.588) 90.475,104.292 90.475,98.069 v1(91.669,96.876) ; 89.281,100.159 88.867,100.159 ; 89.653,115.697 89.653,115.483 89.103,115.483 85.469,111.849 ; v1(91.736,108.681) 91.313,109.104 91.313,110.49 93.853,113.03 93.853,113.157 93.853,113.284 93.726,113.157 93.726,113.03 ; 92.414,99.695 92.414,106.257 93.726,107.569 93.726,107.95 95.005,109.229 95.005,114.545 94.329,115.221 92.054,115.221 91.703,115.572 ; 93.768,99.695 93.768,98.002 94.107,97.663 94.107,96.012 ; 94.107,85.852 91.458,88.501 90.805,88.501 89.713,88.501 89.07,87.859 84.074,87.859 83.82,88.113 83.82,88.494 83.287,89.027 ; v1(76.2,100.99) 76.2,99.027 76.454,98.773 ; v1(76.2,100.99) v1(76.2,101.422) 76.2,102.565 78.952,105.317 ; v1(76.2,100.99) 78.952,103.743 78.952,105.317 ; 77.089,100.584 79.985,103.48 79.985,103.58 ; 77.089,100.584 77.089,99.855 77.724,99.855 79.056,101.187 81.167,101.187 82.448,99.905 83.058,99.905 ; 77.089,100.584 77.089,100.684 79.985,103.58 ; 79.985,103.58 v1(81.332,104.927) 79.985,104.927 ; 79.985,103.58 79.985,104.927 ; 82.169,90.085 82.737,90.085 83.287,89.535 83.287,89.027 ; 82.169,90.085 82.169,89.535 82.779,89.535 83.287,89.027 ; 82.169,90.085 82.169,90.551 82.169,90.576 ; 82.169,90.576 83.312,91.719 83.515,91.719 ; 83.058,99.905 83.566,99.905 84.303,99.905 84.303,95.885 83.515,95.098 83.515,91.719 ; 83.058,99.905 83.058,102.4 83.657,102.999 83.657,105.156 83.657,106.172 83.228,106.601 83.228,107.658 83.541,107.658 85.141,109.258 85.428,109.258 ; 85.428,109.258 85.428,110.465 85.38,110.513 85.38,111.76 85.469,111.849 ; 87.198,115.443 87.782,115.443 92.761,120.421 92.761,122.199 93.177,122.616 94.361,122.616 94.93,122.047 94.93,120.702 91.703,117.475 91.703,115.697 91.703,115.572
  other v1: 46.101,77.343 46.101,77.343 39.37,80.01 56.388,83.82 46.228,90.551 40.64,97.028 69.723,101.854 32.766,108.077 41.402,109.347 53.975,111.887 53.975,113.03 60.198,113.03 53.975,114.3

## Polygon pours and split planes (outlines as drawn)
no net on Top Layer "NONET_L01_P003" (solid, remove dead copper, pour order 3): 72.39,74.994 72.136,75.248 72.136,124.524 72.263,124.397 96.52,124.397 96.52,74.994 96.393,74.867
no net on Top Layer "NONET_L01_P000" (solid, remove dead copper, pour order 0): 27.432,126.111 27.813,125.73 74.041,125.73 74.041,75.819 71.882,73.66 70.739,74.803 28.321,74.803
no net on Bottom Layer "NONET_L02_P002" (solid, remove dead copper, pour order 2): 72.39,74.93 72.39,123.952 96.52,123.952 96.393,123.825 96.393,74.676
no net on Bottom Layer "NONET_L02_P001" (solid, remove dead copper, pour order 1): 27.94,126.111 29.464,124.587 74.549,124.587 74.549,76.581 73.025,75.057 30.988,75.057 29.591,76.454

## Keep-outs
Keep-Out Layer:
  lines w0.254: 30.861,76.2 30.861,124.587 71.501,124.587 71.501,96.393 71.501,76.2 30.861,76.2 ; 72.644,76.073 96.139,76.073 96.139,123.698 72.644,123.698 72.644,76.073

## Other copper
Top Layer:
  text "3.1 (mm)" at 91.468,128.022 h1.52 r304.99
  text "66.04 (mm)" at 56.619,126.086 h1.52
  text "47.88 (mm)" at 97.22,107.016 h1.52 r270.3